# EAGLE board MiniLab (EAGLE 6.6.0)
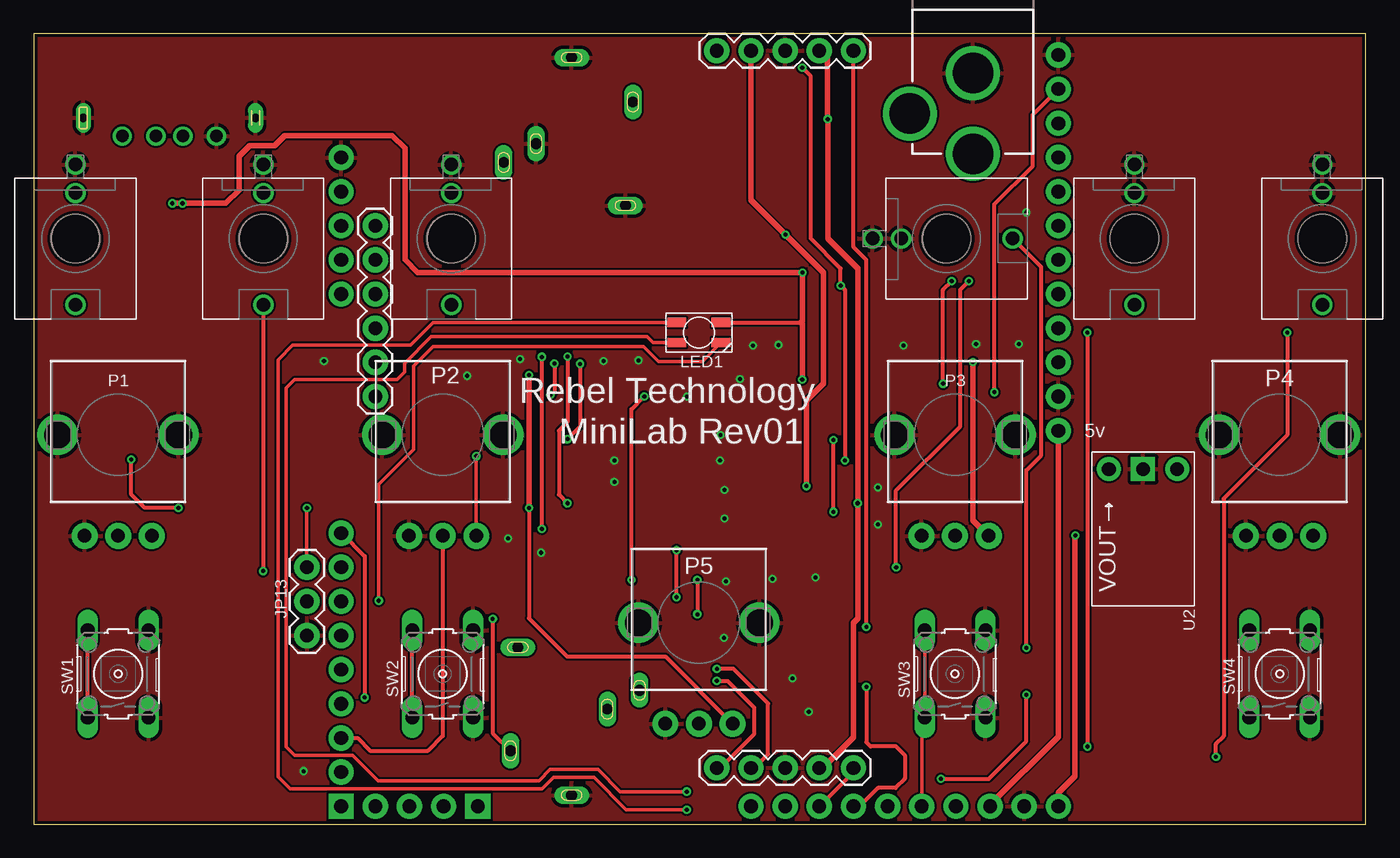
[diagram p0: board, top side]
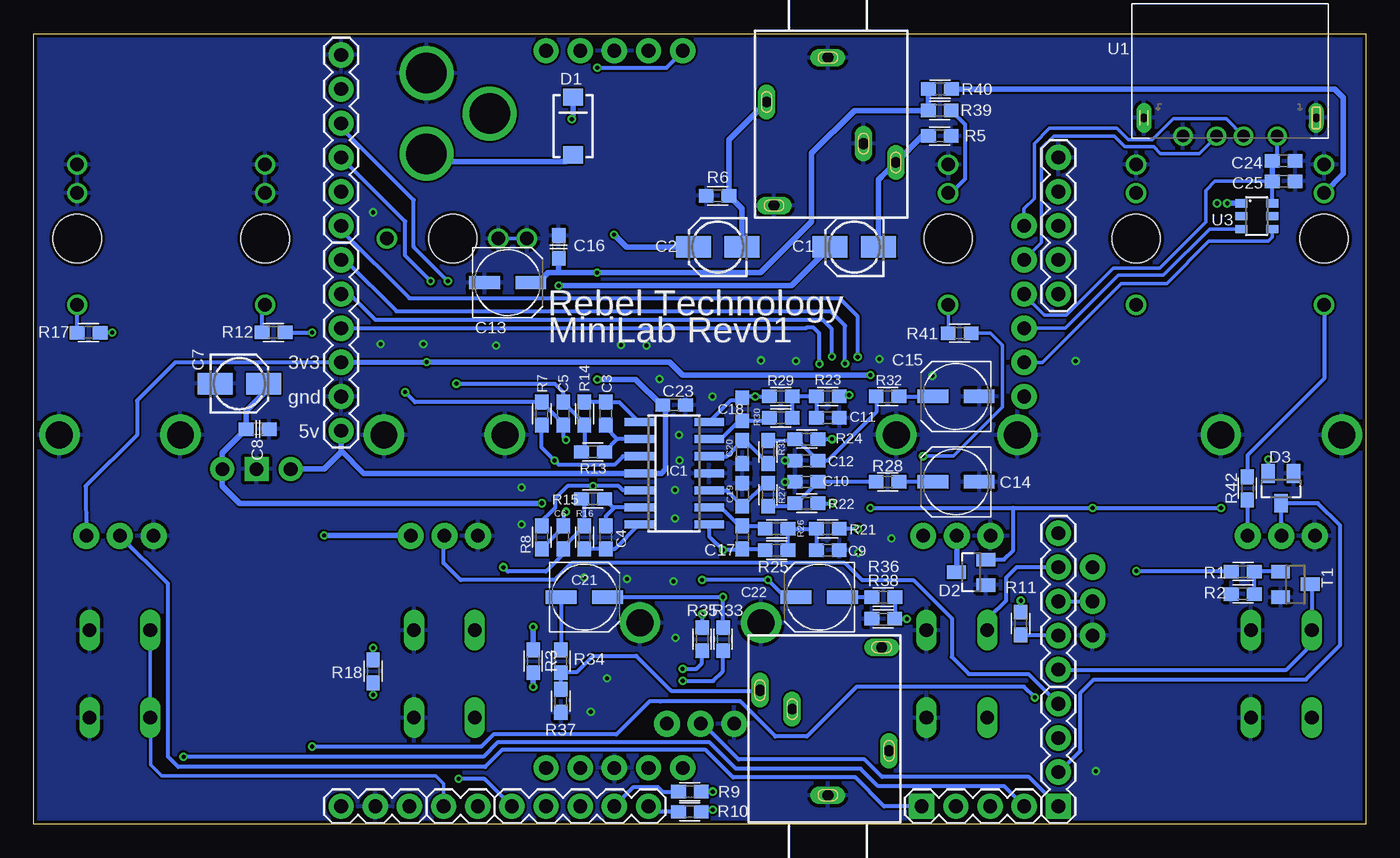
[diagram p1: board, bottom side, seen from below]

Size 99.06 x 58.8 mm. Coordinates in mm from the lower left corner, seen from the top.
Outline: 99.06,58.8 0,58.8 0,0 99.06,0 99.06,58.8
Copper layers (1*16): Top 0.035mm / dielectric 1.5mm / Bottom 0.035mm
Design rules "SeeedStudio_2layer_DRU_no_angle_20140221": minimum track width 6mil, minimum drill 12mil, track to track 6mil, track to pad 6mil, pad to pad 6mil, via to via 6mil, smd to smd 0mil, copper to edge 10mil, drill to drill 10mil, minimum pad ring 10mil, minimum via ring 6mil, stop-mask expansion 2mil, vias tented up to drill 100mil, thermal gap 10mil
Net classes: 1 power: width 0.178 mm, drill 0.305 mm, clearance 0.178 mm to class 0, clearance 0.178 mm

## Footprints (pad centres in the part's own frame; a part is rotated, then mirrored left to right if it is on the bottom)
153CLV-0405 = smd 2.6 x 1.6: + 1.8,0; - -1.8,0
C0603 = smd 1.1 x 1: 1 -0.85,0; 2 0.85,0
CPOL-5 = smd 2.3 x 1: + 1.725,0; - -1.725,0
SMA-DIODE = smd 1.27 x 1.47: A -2.15,0; C 2.15,0
SOT23 = smd 1 x 1.4: 1 -0.95,-1.1; 2 0.95,-1.1; 3 0,1.1
SO14 = smd 0.6 x 2.2: 1 -3.81,-2.6; 2 -2.54,-2.6; 3 -1.27,-2.6; 4 0,-2.6; 5 1.27,-2.6; 6 2.54,-2.6; 7 3.81,-2.6; 8 3.81,2.6; 9 2.54,2.6; 10 1.27,2.6; 11 0,2.6; 12 -1.27,2.6; 13 -2.54,2.6; 14 -3.81,2.6
THONKICONN = drill 1: P$1 0,-5.5; P$2 0,-3.38; P$3 0,4.92 | hole 3.6: 0,0
POWER_JACK_PTH = drill 2.997: GND 0,7.7; GNDBREAK 4.7,10.7; PWR 0,13.7
1X05 = drill 1.016 pad 1.88: 1 0,0; 2 2.54,0; 3 5.08,0; 4 7.62,0; 5 10.16,0
1X02 = drill 1.016 pad 1.88: 1 0,0; 2 2.54,0
1X03 = drill 1.016 pad 1.88: 1 0,0; 2 2.54,0; 3 5.08,0
1X04 = drill 1.016 pad 1.88 square: 1 0,0 | drill 1.016 pad 1.88: 2 2.54,0; 3 5.08,0; 4 7.62,0
1X06 = drill 1.016 pad 1.88: 1 0,0; 2 2.54,0; 3 5.08,0; 4 7.62,0; 5 10.16,0; 6 12.7,0
RGB-LED-703-1028 = smd 0.7 x 1.4: P1 -0.75,1.65; P2 -0.75,-1.65; P3 0.75,-1.65; P4 0.75,1.65
POT-ALPS-RK09L1140 = drill 1 pad 1.93: 1 -2.5,-7.5; 2 0,-7.5; 3 2.5,-7.5 | drill 2: P$5 -4.5,0; P$6 4.5,0
0603 = smd 1.1 x 1: 1 -0.85,0; 2 0.85,0
B3F-10XX = drill 1.016 long: 1 -3.251,2.261; 2 3.251,2.261; 3 -3.251,-2.261; 4 3.251,-2.261
614104190121 = drill 0.92: 1 -3.5,0; 2 -1,0; 3 1,0; 4 3.5,0 | drill 0.6 long: 5 -6.4,-1.35; 6 6.4,-1.35
REG_S9V11F5 = drill 1.016 pad 1.778 square: GND 0,0 | drill 1.016 pad 1.778: VIN -2.54,0; VOUT 2.54,0
SOT23-6 = smd 0.6 x 0.9: 1 -0.95,-1.15; 2 0,-1.15; 3 0.95,-1.15; 4 0.95,1.15; 5 0,1.15; 6 -0.95,1.15
1503_09 = drill 0.8 pad 1.2 long: 1 0,-2.1; 2 -4.55,-5.4; 3 5.05,-9.9; 4 -4,-13.1; 5 2.65,-8.5

## Placement (x,y rotation side)
C1  1u  [153CLV-0405]  38.04,42.93 180 bottom
C2  1u  [153CLV-0405]  48.2,42.93 180 bottom
C3  220p / 470p  [C0603]  56.51,30.54 90 bottom
C4  220p / 470p C0G  [C0603]  56.51,21.34 270 bottom
C5  2n2 / 2n7 C0G  [C0603]  59.69,30.54 270 bottom
C6  2n2 / 2n7 C0G  [C0603]  59.69,21.34 90 bottom
C7  10u  [153CLV-0405]  83.76,32.77 0 bottom
C8  100n 16v  [C0603]  82.4,29.39 0 bottom
C9  2n2 C0G  [C0603]  40,20.38 0 bottom
C10  4n7 / 6n8 C0G  [C0603]  41.59,25.46 180 bottom
C11  2n2 C0G  [C0603]  40,30.23 0 bottom
C12  4n7 / 6n8 C0G  [C0603]  41.59,27.05 180 bottom
C13  22u  [CPOL-5]  63.82,40.29 0 bottom
C14  22u  [CPOL-5]  30.48,25.46 180 bottom
C15  22u  [CPOL-5]  30.48,31.81 180 bottom
C16  100n  [C0603]  60.03,42.93 90 bottom
C17  220p / 470p C0G  [C0603]  46.35,21.34 270 bottom
C18  220p / 470p C0G  [C0603]  46.35,30.86 90 bottom
C19  1n / 1n5 C0G  [C0603]  46.35,24.51 270 bottom
C20  1n / 1n5 C0G  [C0603]  46.35,27.69 90 bottom
C21  22u  [CPOL-5]  58.1,16.89 0 bottom
C22  22u  [CPOL-5]  40.64,16.89 180 bottom
C23  100n  [C0603]  51.43,31.18 0 bottom
C24  10u  [C0603]  6.12,49.33 180 bottom
C25  10u  [C0603]  6.12,47.83 180 bottom
D1  S1J  [SMA-DIODE]  58.96,51.93 90 bottom
D2  BAT54S  [SOT23]  29.34,18.74 90 bottom
D3  BAT54S  [SOT23]  6.32,24.98 180 bottom
IC1  LM324D  [SO14]  51.43,26.1 270 bottom
J1  THONKICONN  [THONKICONN]  3.11,43.56 180 top
J2  THONKICONN  [THONKICONN]  17.08,43.56 180 top
J3  THONKICONN  [THONKICONN]  31.05,43.56 180 top
J4  THONKICONN  [THONKICONN]  67.88,43.56 270 top
J5  THONKICONN  [THONKICONN]  81.85,43.56 180 top
J6  THONKICONN  [THONKICONN]  95.82,43.56 180 top
J7  [POWER_JACK_PTH]  69.85,63.56 180 top
JP1  [1X05]  50.8,57.53 0 top
JP2  [1X05]  50.8,4.19 0 top
JP3  [1X05]  53.34,1.33 180 bottom
JP4  [1X02]  68.58,1.33 0 bottom
JP5  [1X03]  71.12,1.33 180 bottom
JP6  [1X04]  33.02,1.33 0 bottom
JP7  [1X04]  22.86,1.33 90 bottom
JP8  [1X05]  22.86,21.65 270 bottom
JP9  [1X06]  76.2,29.27 90 bottom
JP10  [1X05]  22.86,39.43 90 bottom
JP11  [1X06]  76.2,44.51 90 bottom
JP13  [1X03]  20.32,14.03 90 top
JP14  [1X06]  25.4,44.51 270 top
LED1  MULTICOMP_703-1028  [RGB-LED-703-1028]  49.47,36.58 90 top
P1  POT-ALPS-RK09L1140  [POT-ALPS-RK09L1140]  6.29,28.96 0 top
P2  POT-ALPS-RK09L1140  [POT-ALPS-RK09L1140]  30.42,28.96 0 top
P3  POT-ALPS-RK09L1140  [POT-ALPS-RK09L1140]  68.52,28.96 0 top
P4  POT-ALPS-RK09L1140  [POT-ALPS-RK09L1140]  92.65,28.96 0 top
P5  POT-ALPS-RK09L1140  [POT-ALPS-RK09L1140]  49.47,14.99 0 top
R1  100k  [0603]  9.15,18.79 0 bottom
R2  1M  [0603]  9.15,17.13 0 bottom
R3  100R  [0603]  61.91,12.13 90 bottom
R5  100k  [0603]  31.69,51.18 0 bottom
R6  100k  [0603]  48.2,46.74 180 bottom
R7  10k  [0603]  61.28,30.54 90 bottom
R8  10k  [0603]  61.28,21.34 270 bottom
R9  510R  [0603]  50.27,2.43 0 bottom
R10  510R  [0603]  50.27,0.93 0 bottom
R11  510R  [0603]  25.67,14.93 90 bottom
R12  1k  [0603]  81.22,36.58 0 bottom
R13  560R / 634R  [0603]  57.47,27.69 0 bottom
R14  100R / 91R  [0603]  58.1,30.54 90 bottom
R15  560R / 634R  [0603]  57.47,24.19 0 bottom
R16  100R / 91R  [0603]  58.1,21.34 270 bottom
R17  1k  [0603]  94.97,36.57 0 bottom
R18  1k  [0603]  73.82,11.38 270 bottom
R21  5k1 / 4k42  [0603]  40,21.97 180 bottom
R22  1k / 1k33  [0603]  41.59,23.88 180 bottom
R23  5k1 / 4k42  [0603]  40,31.81 180 bottom
R24  1k / 1k33  [0603]  41.59,28.64 180 bottom
R25  5k1 / 4k99  [0603]  43.81,20.38 180 bottom
R26  2k / 2k32  [0603]  43.81,21.97 180 bottom
R27  1k / 715R  [0603]  44.45,24.51 90 bottom
R28  1k / 1k5  [0603]  35.56,25.46 180 bottom
R29  5k1 / 4k99  [0603]  43.5,31.81 180 bottom
R30  2k / 2k32  [0603]  43.5,30.23 180 bottom
R31  1k / 715R  [0603]  44.45,27.69 270 bottom
R32  1k / 1k5  [0603]  35.56,31.81 180 bottom
R33  100R  [0603]  47.79,13.77 270 bottom
R34  100R  [0603]  59.86,12.13 270 bottom
R35  100R  [0603]  49.35,13.77 270 bottom
R36  100R  [0603]  35.88,16.89 0 bottom
R37  100k  [0603]  59.86,9.17 270 bottom
R38  100k  [0603]  35.88,15.28 180 bottom
R39  220R  [0603]  31.69,53.09 0 bottom
R40  220R  [0603]  31.67,54.68 0 bottom
R41  5k1  [0603]  30.2,36.53 0 bottom
R42  5k1  [0603]  8.82,24.98 270 bottom
SW1  [B3F-10XX]  6.29,11.18 90 top
SW2  [B3F-10XX]  30.42,11.18 90 top
SW3  [B3F-10XX]  68.52,11.18 90 top
SW4  [B3F-10XX]  92.65,11.18 90 top
T1  BC846  [SOT23]  5.24,17.84 270 bottom
U1  [614104190121]  10.1,51.18 180 bottom
U2  REG_S9V11F5  [REG_S9V11F5]  82.49,26.42 180 top
U3  MIC2005  [SOT23-6]  8.12,45.23 270 bottom
X1  1503_09  [1503_09]  40,59.12 0 bottom
X2  1503_09  [1503_09]  40,0.06 180 bottom

## Library data of the parts
C1 C2 C7 C8 C13-C16 C21 C22 J1-J6 LED1 P1-P5 R1-R3 R5-R18 R21-R42 U2 = Rebel
C3-C6 C9-C12 C17-C20 C23-C25 = resistor
D1 J7 JP1-JP11 JP13 JP14 = SparkFun
D2 D3 = diode
IC1 = linear
SW1-SW4 = switch-omron; MPN: B3F-1000; OC_FARNELL: 176432; OC_NEWARK: 36M3542
T1 = transistor
U1 = Wurth-connectors
U3 = James; OC_FARNELL: 2509882
X1 X2 = con-lumberg; OC_FARNELL: 1243244; OC_NEWARK: unknown

## Nets
+3V3: D2.2 D3.2 JP5.3 JP9.3 JP13.3 P3.3 P4.3 P5.3
+5V: C13.+ C16.1 C23.1 IC1.4 JP5.1 JP9.1 LED1.P3 R39.1 R40.1 U2.VOUT U3.1
+9V: D1.A J7.PWR
+VIN: C7.+ C8.1 D1.C JP1.4 JP2.4 U2.VIN
ADC1: JP7.4 P3.2
ADC2: D2.3 JP7.3 P2.2
ADC3: D3.3 JP7.2 P1.2
ADC4: JP7.1 P5.2
AIN_A: C5.1 JP11.4 R13.1 R14.1
AIN_B: C6.1 JP11.3 R15.1 R16.1
AOUT_A+: JP9.5 R22.1
AOUT_A-: JP11.1 R21.1
AOUT_B+: JP9.4 R24.1
AOUT_B-: JP9.6 R23.1
BOOT0: JP8.3 JP13.2
CS_VQ1: JP11.2
CS_VREF: C5.2 C6.2 JP11.5 R7.2 R8.2
DC_IN_L: C1.+ IC1.3 JP1.1 R7.1
DC_IN_R: C2.+ IC1.5 JP1.2 R8.1
DC_OUT_L: JP2.1 R33.2
DC_OUT_R: JP2.2 R35.2
EXTSPI_CLK: JP6.3
EXTSPI_CS_DAC2: JP6.4 R17.2
EXTSPI_MISO: JP6.2
EXTSPI_MOSI_ADC5: JP6.1 P4.2
GND: C7.- C8.2 C9.2 C10.2 C11.2 C12.2 C13.- C14.- C15.- C16.2 C19.1 C20.1 C23.2 C24.1 C25.1 D2.1 D3.1 IC1.11 J1.P$1 J2.P$1 J3.P$1 J4.P$1 J4.P$2 J5.P$1 J5.P$2 J6.P$1 J6.P$2 J7.GND JP1.3 JP2.3 JP5.2 JP9.2 JP10.5 JP11.6 JP13.1 P1.1 P1.P$5 P1.P$6 P2.1 P2.P$5 P2.P$6 P3.1 P3.P$5 P3.P$6 P4.1 P4.P$5 P4.P$6 P5.1 P5.P$5 P5.P$6 R2.1 R5.2 R6.2 R37.2 R38.2 SW1.3 SW1.4 SW2.3 SW2.4 SW3.3 SW3.4 SW4.3 SW4.4 T1.2 U1.4 U1.5 U1.6 U2.GND X1.1 X1.4 X1.5 X2.1
GP1_LEDPWM: JP3.1 R10.1
GP2_LEDPWM: JP3.2 R9.1
GP3_USART_TX: JP2.5 JP3.3
GP4_USART_RX: JP3.4 R3.1
GP5_DAC1: JP3.5 R18.2
GP6_TRIG_IN: JP4.2 SW3.1 SW3.2
GP7_TRIG_IN: JP4.1 SW4.1 SW4.2
GP8_TRIG_IN: JP8.5 SW1.1 SW1.2 T1.3
GP9_LEDPWM: JP8.4 R11.1
GP10_TRIG_IN: JP8.2 SW2.1 SW2.2
GP11_TRIG_OUT: JP8.1 R12.2
IN_L: C1.- R5.1 X1.3
IN_R: C2.- R6.1 X1.2
N$1: JP1.5 R3.2
N$2: J1.P$2 R40.2
N$3: C3.1 IC1.2 R13.2
N$4: C4.2 IC1.7 R16.2
N$5: C4.1 IC1.6 R15.2
N$6: C3.2 IC1.1 R14.2
N$7: C17.1 IC1.9 R26.2
N$8: C15.+ R32.1
N$9: C21.- R34.1
N$10: C14.+ R28.1
N$11: C19.2 IC1.10 R27.2
N$12: C18.2 C22.+ IC1.14 R29.2 R35.1
N$13: C22.- R36.1
N$14: LED1.P2 R11.2
N$15: C10.1 R22.2 R27.1 R28.2
N$16: LED1.P1 R9.2
N$17: LED1.P4 R10.2
N$19: J5.P$3 R12.1
N$20: J6.P$3 R17.1
N$21: J4.P$3 R18.1
N$22: J2.P$3 R1.1
N$23: J3.P$2 R39.2
N$24: C11.1 R23.2 R29.1 R30.1
N$25: P2.3 R41.2
N$26: C18.1 IC1.13 R30.2
N$27: J3.P$3 R41.1
N$30: C20.2 IC1.12 R31.2
N$31: P1.3 R42.2
N$32: C12.1 R24.2 R31.1 R32.2
N$33: J1.P$3 R42.1
N$37: R1.2 R2.2 T1.1
N$39: C17.2 C21.+ IC1.8 R25.2 R33.1
N$41: C9.1 R21.2 R25.1 R26.1
OUT_L: R34.2 R37.1 X2.3
OUT_R: R36.2 R38.1 X2.2
TOP_GND: U3.2
USB_D_D+: JP10.2
USB_D_D-: JP10.3
USB_D_ID: JP10.1
USB_D_VBUS: JP10.4
USB_H_D+: JP14.2 U1.3
USB_H_D-: JP14.1 U1.2
USB_H_PWR_EN: JP14.4 U3.3
USB_H_PWR_FAULT: JP14.5 U3.4
USB_H_VBUS: C24.2 C25.2 JP14.3 U1.1 U3.6

## Tracks (layer width: path | path; a pad name or v marks a point on that pad's centre or on a via)
+3V3  (via drill 0.3)
  Top 0.254: v20.32,23.53 JP13.3
  Top 0.305: v10.77,23.53 8.27,23.53 7.27,24.53 v7.27,27.13 | v36.83,23.53 36.83,15.31 39.67,12.48 46.98,12.48 P5.3
  Top 0.406: v69.85,34.37 69.85,22.61 71,21.46 P3.3 71.02,21.44 | v36.83,33.4 v36.83,23.53 | JP5.3 76.2,2.35 77.41,3.56 77.41,21.42 v77.47,21.48
  Bottom 0.305: P4.3 95.19,25.15 91.38,28.96 91.38,31.5 88.52,34.35 JP9.3 | v7.27,27.13 D3.2 | 71.04,21.48 P3.3 | v36.83,23.53 26.22,23.53 | 26.22,23.53 v20.32,23.53 | v20.32,23.53 20.27,23.53 | 20.27,23.53 10.82,23.53 10.77,23.48 v10.77,23.53 | D2.2 26.9,19.69 26.22,20.38 26.22,23.53 | v20.32,23.53 20.27,23.53 | v20.32,23.53 | v20.32,23.53
  Bottom 0.406: JP9.3 v69.85,34.37 51.77,34.37 50.8,33.4 v36.83,33.4 | v77.47,21.48 71.04,21.48
+5V  (via drill 0.3)
  Top 0.305: JP5.1 71.12,1.43 | LED1.P3 57.04,37.33 57.15,37.21
  Top 0.406: v57.15,33.08 57.15,37.21 | 71.12,1.43 76.2,6.51 JP9.1 | 57.04,37.33 57.15,37.44 57.15,41.01 v57.17,41.03 28.57,41.03 27.62,41.98 27.62,50.28 26.67,51.23 18.67,51.23 17.92,50.48 16.07,50.48 15.27,49.68 15.27,47.18 14.27,46.18 v11.07,46.18 v10.32,46.18
  Bottom 0.305: R39.1 32.52,53.11 | 76.2,27.69 JP9.1
  Bottom 0.406: v57.15,33.08 54.29,33.08 52.39,31.18 C23.1 52.07,30.96 52.07,26.42 52.39,26.1 IC1.4 74.52,26.1 76.2,27.78 JP9.1 | 32.52,53.11 R40.1 | 59.97,41.02 60.82,41.02 61.37,40.48 62,40.48 C13.+ | C16.1 60.03,41.08 59.97,41.02 | U2.VOUT 77.47,26.42 76.2,27.69 | R39.1 38.04,53.09 41.21,49.91 41.21,44.83 45.02,41.02 57.15,41.02 57.15,41.03 v57.17,41.03 59.97,41.03 59.97,41.02 | U3.1 v10.32,46.18
+9V
  Bottom 0.406: J7.PWR 69.1,49.86 68.52,49.28 59.46,49.28 D1.A
+VIN  (via drill 0.3)
  Top 0.406: JP2.4 58.67,4.19 60.96,6.48 60.96,14.99 61.28,15.3 v61.28,23.88 61.28,41.34 59.06,43.56 v59.06,52.44 v59.04,52.45 59.04,56.28 59.04,56.91 JP1.4
  Bottom 0.406: C7.+ 81.96,32.03 82.49,31.5 83.25,30.73 C8.1 85.03,27.61 U2.VIN 85.03,25.15 83.76,23.88 v61.28,23.88 | D1.C 58.96,52.54 v59.04,52.45
ADC1
  Bottom 0.305: P3.2 68.58,21.39 68.58,19.43 67.31,18.16 60.32,18.16 59.06,19.43 38.74,19.43 37.46,18.16 33.66,18.16 30.8,15.3 30.8,12.45 29.53,11.18 25.1,11.18 22.88,8.95 JP7.4
ADC2
  Top 0.305: P2.2 30.42,6.58 29.32,5.48 25.02,5.48 24.08,6.41 JP7.3
  Bottom 0.406: D2.3 30.42,18.74 P2.2
ADC3
  Bottom 0.305: P1.2 6.32,21.49 D3.3 3.57,23.88 1.92,22.23 1.92,13.33 4.47,10.78 20.22,10.78 21.22,9.78 21.22,5.47 22.81,3.87 JP7.2
ADC4
  Bottom 0.305: JP7.1 25.05,3.53 35.97,3.53 37.27,4.83 46.64,4.83 48.51,6.7 49.3,7.49 P5.2
AIN_A  (via drill 0.3)
  Top 0.305: v67.63,32.77 67.63,39.75 v68.26,40.39
  Bottom 0.305: R13.1 58.1,27.9 R14.1 58.1,29.81 C5.1 59.69,32.13 60.32,32.77 v67.63,32.77 | v68.26,40.39 70.8,42.93 70.8,46.42 76.2,51.82 JP11.4
AIN_B  (via drill 0.3)
  Top 0.305: v64.14,19.11 64.14,24.83 68.9,29.59 68.9,39.75 v69.53,40.39
  Bottom 0.305: R16.1 58.1,22.07 | R16.1 58.1,23.98 R15.1 | v64.14,19.11 63.82,18.8 60.96,18.8 59.69,20.07 C6.1 59.69,20.6 R16.1 | v69.53,40.39 71.44,42.29 71.44,44.83 JP11.3
AOUT_A+  (via drill 0.3)
  Top 0.305: v39.71,34.78 39.69,34.81 39.69,29.91 39.05,29.27 39.05,24.51 v39.69,23.88
  Bottom 0.305: R22.1 v39.69,23.88 | JP9.5 75.57,39.43 73.66,37.53 40.42,37.53 39.71,36.81 v39.71,34.78
AOUT_A-  (via drill 0.3)
  Top 0.305: v37.78,34.76 v37.78,21.97
  Bottom 0.305: v37.78,21.97 R21.1 | JP11.1 76.2,44.2 71.12,39.12 39.16,39.12 37.78,37.74 v37.78,34.76
AOUT_B+  (via drill 0.3)
  Top 0.305: v40.64,34.24 40.64,29.59 v39.69,28.64
  Bottom 0.305: R24.1 v39.69,28.64 | JP9.4 41.6,36.91 41.59,36.93 41.07,36.93 40.64,36.5 v40.64,34.24
AOUT_B-  (via drill 0.3)
  Top 0.305: v38.72,34.26 38.74,34.13 38.74,32.13 v38.42,31.92
  Bottom 0.305: v38.42,31.92 R23.1 | JP9.6 75.88,41.97 72.07,38.16 39.8,38.16 38.72,37.08 v38.72,34.26
BOOT0
  Bottom 0.305: JP8.3 JP13.2
CS_VREF  (via drill 0.3)
  Top 0.305: v71.44,32.13 71.44,46.1 74.29,48.96 74.29,52.77 JP11.5 | v59.47,23.24 v59.47,28.59
  Bottom 0.305: R8.2 59.69,22.07 C6.2 59.67,22.19 59.67,23.03 v59.47,23.24 | v71.44,32.13 70.7,31.39 R7.2 59.69,29.81 C5.2 59.69,28.81 v59.47,28.59
DC_IN_L  (via drill 0.3)
  Top 0.305: v60.32,27.05 60.32,39.75 v60.01,40.07 60.01,41.34 57.79,43.56 57.79,55.63 v57.15,56.26
  Bottom 0.305: IC1.3 55.24,27.37 55.88,26.73 60.01,26.73 v60.32,27.05 61.28,28 R7.1 | v57.15,56.26 54.61,56.26 52.01,56.26 50.8,57.47 JP1.1
  Bottom 0.406: v60.01,40.07 43.5,40.07 42.69,40.07 C1.+
DC_IN_R  (via drill 0.3)
  Top 0.305: 55.88,43.83 v55.91,43.85
  Top 0.406: v57.47,25.15 57.47,31.5 58.74,32.77 58.74,41.02 v55.91,43.85 53.34,46.42 53.34,46.67 JP1.2
  Bottom 0.305: IC1.5 55.24,24.83 55.56,25.15 v57.47,25.15 59.37,25.15 60.01,24.51 60.26,24.26 60.26,23.56 60.58,23.24 61.28,22.54 R8.1
  Bottom 0.406: C2.+ 54.99,42.93 v55.91,43.85
DC_OUT_L  (via drill 0.3)
  Top 0.305: JP2.1 51.05,4.19 51.69,4.83 53.59,6.73 53.59,8.67 51.6,10.66 v50.79,10.66
  Bottom 0.305: v50.79,10.66 48.53,10.66 47.82,11.38 47.82,12.89 R33.2
DC_OUT_R  (via drill 0.3)
  Top 0.305: JP2.2 53.59,4.19 54.61,5.21 54.61,8.98 52.03,11.56 v50.8,11.56
  Bottom 0.305: v50.8,11.56 49.78,11.56 49.37,11.98 49.37,12.9 R35.2
EXTSPI_CS_DAC2  (via drill 0.3)
  Top 0.305: v93.22,36.57 93.22,28.95 88.49,24.22 88.49,6.55 87.92,5.98 v87.92,5.03
  Bottom 0.254: 94.22,36.57 R17.2 | 93.32,36.57 v93.22,36.57
  Bottom 0.305: JP6.4 26.89,2.83 36.27,2.83 37.57,4.13 46.84,4.13 48.79,6.08 64.57,6.08 65.62,5.03 v87.92,5.03 | 94.22,36.57 93.32,36.57
EXTSPI_MOSI_ADC5
  Bottom 0.305: P4.2 89.07,17.88 89.07,5.02 88.31,4.26 65.49,4.26 64.22,5.53 49.09,5.53 47.04,3.48 37.97,3.48 35.82,1.33 JP6.1
GND  (via drill 0.3)
  Bottom 0.254: J4.P$1 J4.P$2
  Bottom 0.305: C12.2 v43.18,27.05 | C10.2 v43.18,25.46
  other vias: 64.67,35.61 70.09,35.71 73.26,35.71 73.81,45.51 20.08,3.95 51.08,28.95 51.03,27.05 51.38,24.85 51.38,22.75 52.53,33.1 48.58,31.8 37.73,20.2 51.48,18.05 58.13,18.35 54.93,18.25 62.78,25.05 62.78,22.3 42.38,34.45 44.98,34.5 53.48,35.6 55.38,35.65 35.28,21.25 21.58,34.45 56.43,10.85 57.63,8.35 51.33,13.85 36.18,34.6 32.23,33.35
  pour Bottom: -13.97,-2.79 -13.97,63.25 115.57,63.25 115.57,-2.79
  pour Top: -12.7,-4.06 -12.7,61.98 116.84,61.98 116.84,-4.06
GP1_LEDPWM
  Bottom 0.305: R10.1 52.93,0.93 JP3.1
GP2_LEDPWM
  Bottom 0.305: JP3.2 54.44,2.78 52.67,2.78 52.32,2.43 R9.1
GP3_USART_TX
  Top 0.305: JP3.3 59.81,2.73 60.96,3.87 JP2.5
GP4_USART_RX  (via drill 0.3)
  Top 0.305: 60.99,1.37 JP3.4 61.42,1.33 62.78,2.7 64.09,2.7 64.77,3.39 64.77,5.14 64.14,5.78 62.23,5.78 61.91,6.1 v61.91,10.22
  Bottom 0.406: R3.1 v61.91,10.22
GP5_DAC1  (via drill 0.3)
  Top 0.305: v67.47,3.38 71.02,3.38 73.82,6.18 v73.82,9.63
  Bottom 0.305: JP3.5 65.54,3.38 v67.47,3.38 | v73.82,9.63 R18.2
GP6_TRIG_IN
  Top 0.254: SW3.1 SW3.2 | JP4.2 66.04,6.95 66.28,7.19 66.28,7.9
  Top 0.406: 66.28,7.9 SW3.1
GP7_TRIG_IN
  Bottom 0.254: JP4.1 68.58,3 69.19,3.61 89.54,3.61 90.37,4.44 90.37,7.91 | SW4.2 SW4.1
  Bottom 0.406: 90.37,7.91 SW4.1
GP8_TRIG_IN
  Top 0.305: SW1.1 SW1.2
  Bottom 0.305: SW1.2 4.03,15.42 | T1.3 4.03,17.47 SW1.2 | JP8.5 5.91,11.49 4.03,13.38 SW1.2
GP9_LEDPWM
  Bottom 0.305: JP8.4 25.62,14.03 R11.1
GP10_TRIG_IN
  Top 0.305: SW2.1 SW2.2
  Bottom 0.305: 22.86,19.08 JP8.2 25.98,19.11 26.77,18.33 26.77,16.63 28.02,15.38 28.02,14.57 SW2.2
GP11_TRIG_OUT  (via drill 0.3)
  Top 0.254: JP8.1 22.89,21.65
  Top 0.305: v78.36,36.58 v78.36,5.78 | 22.89,21.65 24.62,19.93 v24.62,9.43
  Bottom 0.305: R12.2 v78.36,36.58 | v24.62,9.43 25.42,10.23 37.87,10.23 41.57,6.53 43.92,6.53 46.52,9.13 52.47,9.13 53.27,9.13 55.72,6.68 64.87,6.68 65.76,5.78 v78.36,5.78
IN_L
  Bottom 0.305: R5.1 32.99,51.18
  Bottom 0.406: 32.99,51.18 X1.3 35.98,48.19 36.24,47.94 C1.-
IN_R
  Bottom 0.406: C2.- 46.4,45.79 R6.1 47.35,50.93 X1.2
N$1  (via drill 0.3)
  Top 0.305: v61.91,14.67 61.91,41.97 60.96,42.93 JP1.5
  Bottom 0.406: R3.2 v61.91,14.67
N$2
  Bottom 0.406: R40.2 2.32,54.68 1.67,54.03 1.67,48.39 J1.P$2
N$3
  Bottom 0.305: IC1.2 55.67,28.64 | 55.67,28.64 R13.2 | C3.1 56.51,29.49 55.67,28.64
N$4
  Bottom 0.305: IC1.7 55.84,20.49 C4.2 R16.2
N$5
  Bottom 0.305: IC1.6 55.88,23.56 | 55.88,23.56 55.98,23.56 R15.2 | C4.1 56.51,22.92 55.88,23.56
N$6
  Bottom 0.305: IC1.1 55.52,31.39 C3.2 R14.2
N$7
  Bottom 0.305: R26.2 44.88,22.19 C17.1 46.57,21.97 46.57,22.19 47.94,23.56 IC1.9
N$8
  Bottom 0.305: R32.1 C15.+
N$9
  Bottom 0.305: C21.- 59.83,13.64 R34.1
N$10
  Bottom 0.305: C14.+ R28.1
N$11
  Bottom 0.305: R27.2 44.66,25.36 C19.2 47.52,24.83 IC1.10
N$12  (via drill 0.3)
  Top 0.305: v44.45,18.16 44.45,30.86 v45.4,31.81 | v49.35,18.16 v49.35,15.62
  Bottom 0.305: 44.13,17.84 v44.45,18.16 | 44.45,31.92 R29.2 v45.4,31.81 46.25,31.81 C18.2 46.57,31.5 47.25,31.5 IC1.14 | C22.+ 43.18,16.89 v44.45,18.16 | v44.45,18.16 v49.35,18.16 | v49.35,15.62 R35.1
N$13
  Bottom 0.305: C22.- R36.1
N$14  (via drill 0.3)
  Top 0.254: v25.67,16.63 25.67,25.28 28.27,27.88 28.27,34.08 29.72,35.53 45.37,35.53 46.47,34.43 49.72,34.43 LED1.P2
  Bottom 0.254: R11.2 v25.67,16.63
N$15
  Bottom 0.305: R27.1 42.66,23.66 R22.2 42.33,23.88 C10.1 R28.2
N$16  (via drill 0.3)
  Top 0.254: v48.57,2.43 43.62,2.43 41.97,4.08 38.42,4.08 37.57,3.23 25.62,3.23 23.72,5.13 19.42,5.13 18.77,5.78 18.77,32.43 19.42,33.08 27.02,33.08 27.57,33.63 27.57,34.28 29.57,36.28 45.62,36.28 46.07,35.83 LED1.P1
  Bottom 0.305: R9.2 v48.57,2.43
N$17  (via drill 0.3)
  Top 0.254: v48.57,1.08 44.07,1.08 41.67,3.48 38.67,3.48 37.82,2.63 19.07,2.63 18.17,3.53 18.17,34.53 19.27,35.63 28.02,35.63 29.72,37.33 LED1.P4
  Bottom 0.305: v48.57,1.08 R10.2
N$19
  Bottom 0.305: R12.1 82.07,38.43 J5.P$3
N$20
  Bottom 0.305: R17.1 J6.P$3
N$21  (via drill 0.3)
  Top 0.305: v73.82,13.13 73.82,26.33 74.92,27.43 74.92,41.45 J4.P$3
  Bottom 0.305: R18.1 v73.82,13.13
N$22  (via drill 0.3)
  Top 0.305: J2.P$3 17.08,18.84
  Top 0.406: 17.08,18.84 v17.07,18.83
  Bottom 0.305: R1.1 10.03,18.83 13.22,18.83 v17.07,18.83
N$23
  Bottom 0.305: J3.P$2 30.85,46.94 29.78,48.01 29.78,52.03 R39.2
N$24
  Bottom 0.305: R30.1 R29.1 R23.2 C11.1
N$25  (via drill 0.3)
  Top 0.254: v32.92,27.38 P2.3
  Bottom 0.254: R41.2 27.92,36.53 27.02,35.63 27.02,31.03 30.67,27.38 v32.92,27.38
N$26
  Bottom 0.305: R30.2 44.56,30.01 C18.1 46.57,30.23 46.57,30.01 47.94,28.64 IC1.13
N$27
  Bottom 0.254: R41.1 J3.P$3
N$30
  Bottom 0.305: R31.2 46.15,28.54 C20.2 47.52,27.37 IC1.12
N$31
  Bottom 0.305: R42.2 8.82,21.49 P1.3
N$32
  Bottom 0.305: R32.2 36.41,30.65 40,27.05 C12.1 42.33,28.64 R24.2 42.54,28.54 R31.1
N$33
  Bottom 0.305: J1.P$3 3.11,33.13 8.82,27.43 R42.1
N$37
  Bottom 0.305: T1.1 R1.2 R2.2
N$39  (via drill 0.3)
  Top 0.305: v47.79,16.89 v47.79,20.38
  Bottom 0.305: R25.2 44.77,20.49 C17.2 46.46,20.38 v47.79,20.38 48.84,21.42 IC1.8 48.89,22.23 | C21.+ v47.79,16.89 R33.1
N$41
  Bottom 0.305: R25.1 R26.1 R21.2 C9.1
OUT_L
  Bottom 0.305: R34.2 R37.1 59.86,11.23 59.77,11.33 58.67,11.33 57.47,12.53 54.27,12.53 51.67,9.93 45.09,9.93 X2.3
OUT_R  (via drill 0.3)
  Top 0.305: v34.14,15.27 34.14,6.78 X2.2
  Bottom 0.305: v34.14,15.27 v34.14,15.28 R38.1 R36.2
USB_H_D+
  Bottom 0.254: U1.3 12.4,49.88 15.27,49.88 15.77,50.38 17.92,50.38 18.72,51.18 23.22,51.18 24.12,50.28 24.12,43.26 JP14.2
USB_H_D-
  Bottom 0.254: U1.2 10.39,52.48 14.32,52.48 15.87,50.93 17.67,50.93 18.52,51.78 23.52,51.78 24.67,50.63 24.67,46.53 25.42,45.78 25.42,44.53 JP14.1
USB_H_PWR_EN
  Bottom 0.254: JP14.4 22.35,36.89 18.42,40.83 15.07,40.83 11.62,44.28 U3.3
USB_H_PWR_FAULT
  Bottom 0.254: JP14.5 24.04,34.35 18.17,40.23 14.82,40.23 11.67,43.38 7.27,43.38 6.97,43.68 U3.4
USB_H_VBUS
  Bottom 0.254: JP14.3 25.4,39.36 23.92,37.88 22.27,37.88 18.77,41.38 15.32,41.38 11.92,44.78 11.92,47.13 11.22,47.83 C25.2
  Bottom 0.305: C24.2 6.6,49.7 U1.1 | U3.6 C25.2
  Bottom 0.406: C25.2 C24.2

## Text on the board
tPlace: Rebel Technology | MiniLab Rev01 | 5v
bPlace: Rebel Technology | MiniLab Rev01 | 3v3 | gnd | 5v